# Altium PCB Power_Board.PcbDoc (part 3 of 3)
Units mil, origin at the board's own origin, x right, y up, seen from the top; angles counter-clockwise.
Board outline 5980 x 2140 mil, 4 copper layers (Top Layer, Layer 1, Layer 2, Bottom Layer), stack 23.756 mil thick; 228 components, 110 nets, 609 pads, 397 vias.
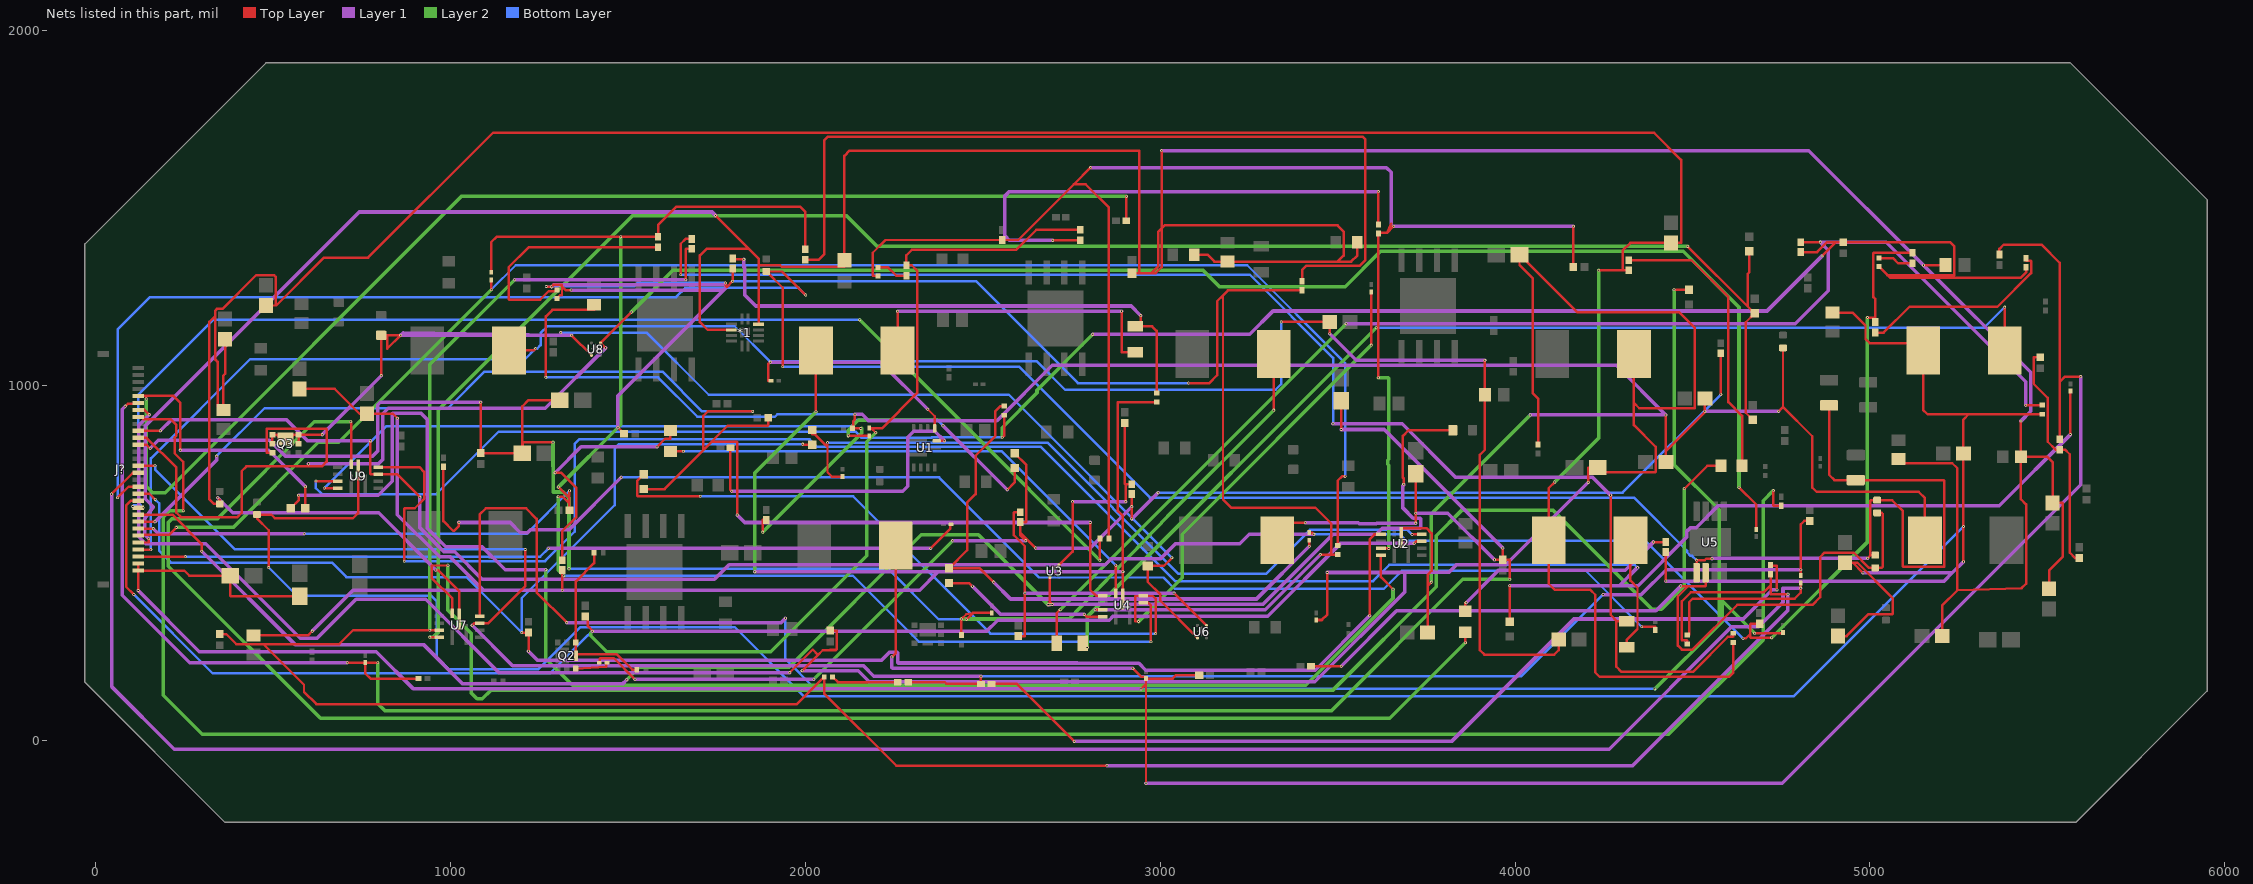
[diagram p5: the nets of this part, all layers, seen from the top]

## Via types
v1: diameter 7.87, hole 3.94, Top Layer to Layer 1, 260 vias
v2: diameter 7.87, hole 3.94, Top Layer to Bottom Layer, 100 vias
v3: diameter 7.87, hole 3.94, Layer 2 to Bottom Layer, 17 vias
v4: diameter 7.87, hole 3.94, Layer 1 to Layer 2, 14 vias
v5: diameter 19.68, hole 7.87, Top Layer to Bottom Layer, 6 vias

## Nets (pads, with @x,y where several pads share a name; then routed paths per layer and width w, separated by ;. In a path a pad name is that pad's centre, name@x,y a point inside that pad or via, vN(x,y) a via of type N, cw(c..) or ccw(c..) an arc to the next point about the centre after c; other vN are vias at no path point) (continued)
NetC33_2: C33.2 C34.1 C35.1 C36.1 C37.1 L3.1 R14.1 R17.1 U2.7 | length 6995.7
  Top Layer w7: v2(1269,1024) 1269,1195.5 1287.5,1214 1405,1214 C33.2@1405,1228.43 ; v1(1880,588) 1880,621.6 1880.5,622.1 R14.1@1890,622.1 ; v2(2140,920) 2139.83,919.83 2139.83,905.07 2134.76,900 2134.76,881.96 R17.1@2132.79,880 v1(2156.2,880) ; U2.7@3679.69,573.31 3679.69,599 3750,599 3765,584 3765,479 3753.56,467.56 3753.56,436.56 ; C35.1@3753.56,305 3753.56,436.56 ; v2(3764,447) 3753.56,436.56 ; C34.1@4425,785 4425,816 ; v1(4425,918) 4425,816 ; C36.1@4535,965 v2(4535,928) 4535,926 4425,816 ; v2(4742.5,928) 4755,940.5 ; C37.1@4755,1107.28 4755,940.5 ; L3.1@5155,565 5155,683.5 5137.5,701 4850,701 4837.5,713.5 4837.5,858 4755,940.5
  Layer 1 w10: v2(2140,920) 2160,920 2178,902 2540,902 2696,1058 4285,1058 v1(4425,918) v4(4043,918) ; v2(4535,928) v2(4742.5,928)
  Layer 2 w10: v1(1880,588) 2159,867 2159,880 ; v2(3764,447) 3764,639 v4(4043,918)
  Bottom Layer w7: v2(1269,1024) 1585,1024 1696,913 1914.38,913 1921.38,920 v2(2140,920)
NetC38_1: C38.1 R25.2 R26.1 | length 660.6
  Top Layer w7: R25.2@5480,1080.75 5461.75,1080.75 5461,1080 5461,1006 5501,966 5501,842.5 5523.26,820.24 R26.1@5535,820.24 5550,820.24 5563,807.24 5563,530 5578.35,514.65 C38.1@5590,514.65
NetC48_1: C48.1 R29.2 U3.3 | length 585.6
  Top Layer w7: U3.3@2715,495 2753,533 v2(2753,674) ; C48.1@2900,895 2900,723.9 2901,722.9 2904,722.9 ; v2(2903,674) 2903,721.9 2904,722.9 ; R29.2@2920,722.9 2904,722.9
  Layer 1 w10: v2(2753,674) v2(2903,674)
NetC52_1: C52.1 U4.8 | length 1466.7
  Top Layer w7: C52.1@1620,815.47 v1(1656.47,815.47) ; U4.8@2875.32,415.75 v1(2875.32,494)
  Bottom Layer w7: v1(1656.47,815.47) 2553.84,815.47 v1(2875.32,494)
NetC52_2: C52.2 R33.2 | length 685.1
  Top Layer w7: v1(1295,755) 1312.65,755 1355,712.65 1355,631 1315,591 R33.2@1315,508.95 ; v1(1582,828) 1605,851 1619,851 C52.2@1620,874.53
  Layer 1 w10: v1(1295,755) 1368,828 v1(1582,828)
NetC55_1: C55.1 L5.2 | length 894.4
  Top Layer w7: L5.2@2260,1100 v1(2260,1210) ; v1(2891,1210) 2891,1096 2892,1095 C55.1@2930,1095
  Layer 1 w10: v1(2260,1210) v1(2891,1210)
NetC55_2: C55.2 R36.2 R39.2 | length 1546.3
  Top Layer w7: R39.2@1795,1358.95 1795,1357 v1(1827,1357) ; C55.2@2930,1167.83 C55.2@2945,1167.83 ; v2(2945,1198) C55.2@2945,1167.83 ; R36.2@2990,980 2990,1155 2977.17,1167.83 C55.2@2945,1167.83
  Layer 1 w10: v1(1827,1357) 1827,1334.94 1829.94,1332 1829.94,1255.06 1860,1225 2918,1225 v2(2945,1198)
NetC56_2: C56.2 C57.1 C58.1 L5.1 R33.1 R36.1 U4.7 | length 5373.3
  Top Layer w7: C56.2@445,296.57 598.07,296.57 v1(610.57,309.07) ; C57.1@575,991.44 674,991.44 744,921.44 C58.1@765,921.44 837.84,921.44 v1(850.5,908.78) ; v1(1315,424) R33.1@1315,481.05 ; v1(2030,927) L5.1@2030,1100 ; U4.7@2895,400 v1(2895,476) 2895,633 2881,647 2881,953.41 2882,954.41 R36.1@2990,954.41
  Layer 1 w10: v1(610.57,309.07) 725.5,424 1093,424 ; v1(850.5,908.78) 850.5,637.23 969.54,518.19 998.81,518.19 1093,424 ; v1(1858,476) 2374,476 ; v1(2895,476) 2374,476 ; 1093,424 v1(1315,424) 2322,424 2374,476
  Layer 2 w10: v1(1858,476) 1858,755 v1(2030,927)
  other v2: 2895,476
NetC64_1: C64.1 R43.1 R44.1 U5.2 | length 2368.5
  Top Layer w7: R43.1@3424.76,210 v1(3510,210) ; v1(4467,436) 4486.5,436 ; U5.2@4537.2,473.39 4537.2,437 4536.2,436 4486.5,436 ; R44.1@5020,642.28 5033,642.28 5036.38,638.9 5036.38,490.67 5033,487.28 C64.1@5015,487.28 4997.22,487.28 4954.5,530 4872.5,530 4860,517.5 4860,405 4838,383 4626,383 4500,257 4470,257 4458.75,268.25 4458.75,407.25 4486.5,435 4486.5,436
  Layer 1 w10: v1(3510,210) 3666,366 4397,366 v1(4467,436)
NetC66_1: C66.1 C88.1 Q3.1 Q3.2 Q3.5 Q3.6 Q3.7 U6.1 U8.1 | length 4042.4
  Top Layer w7: Q3.2@498.09,837.2 Q3.1@498.09,862.8 510,862.8 522.8,850 Q3.7@535,850 547,850 559.8,862.8 Q3.6@571.91,862.8 ; Q3.5@571.91,837.2 Q3.6@571.91,862.8 ; v2(639,862.8) Q3.6@571.91,862.8 ; v2(805,1028.8) C88.1@805,1142.44 821,1142.44 ; v2(1341.26,1142.44) U8.1@1397.2,1086.5 ; v1(3033,515.5) 3009.94,492.44 C66.1@2965,492.44 2965,447.43 3000.46,411.97 3000.46,394.54 U6.1@3105,290 ; 821,1142.44 v2(859.44,1142.44) 822,1105 822,1141.44 821,1142.44
  Layer 1 w10: v2(639,862.8) v2(805,1028.8) ; v1(1311,1150) 1311,1142.44 ; v2(1341.26,1142.44) 1311,1142.44 ; 1311,1142.44 v2(859.44,1142.44) 867,1150 1310.87,1142.44 1311,1142.44
  Bottom Layer w7: v1(1311,1150) 1553,1150 1728,975 2573.5,975 v1(3033,515.5)
NetC67_1: C67.1 R45.2 U6.3 | length 1067.8
  Top Layer w7: C67.1@2600,294.65 2618,294.65 ; R45.2@2605,643.95 2589,643.95 2588,642.95 2588,579 2619,548 v2(2619,416) ; v2(3039.04,416) U6.3@3130.59,324.45 ; 2618,294.65 v2(2619,416) ; 2618,294.65 2619,295.65 v2(2619,416)
  Layer 1 w10: v2(2619,416) v2(3039.04,416)
NetC71_1: C71.1 U7.8 | length 4867.3
  Top Layer w7: v1(993,494) 947,493 947,458.94 1005.63,400.31 U7.8@1005.63,359.06 ; v1(4477,710) 4542,775 C71.1@4580.47,775
  Layer 2 w10: v1(993,494) 993,368 1058,303 1058,135 1075,118 1090,118 1113.68,141.68 3485.68,141.68 3778,434 3778,578 3849,649 4108,649 4386,371 4412.5,371 4477,435.5 v1(4477,710)
NetC71_2: C71.2 R51.2 | length 815
  Top Layer w7: R51.2@4320,1353.95 4497.05,1353.95 4601,1250 4601,954 4639.53,915.47 C71.2@4639.53,775
NetC74_1: C74.1 L6.2 | length 322.1
  Top Layer w7: C74.1@4315,263.58 4315,285 4345,315 4345,431 4325,451 L6.2@4325,565
NetC74_2: C74.2 R54.2 R57.2 | length 4015.8
  Top Layer w7: v1(1649,1313) 1649,1400.45 1662.5,1413.95 R57.2@1680,1413.95 ; v1(4269,691.94) 4269,354.92 4287.5,336.42 ; C74.2@4315,336.42 4287.5,336.42 ; R54.2@4615,302.8 4615,294 4614,293 4600,293 4501,194 4300,194 4285,209 4285,333.92 4287.5,336.42
  Layer 1 w10: v1(3487,893) 3682,893 3833.06,741.94 4219,741.94 v1(4269,691.94)
  Bottom Layer w7: v1(1649,1313) 3253,1313 3487,1079 v1(3487,893)
NetC75_2: C75.2 C76.1 C77.1 C78.1 C79.1 L6.1 R51.1 R54.1 U7.7 | length 8791
  Top Layer w7: v1(344,685) 350,679 C79.1@350,667.28 333.72,667.28 321,680 321,1180.53 337.5,1197.03 ; C77.1@365,1131.44 365,1034 360,1029 C75.2@360,931.57 357.05,931.57 343.81,944.81 343.81,1067.76 337.5,1074.08 337.5,1197.03 ; C78.1@480,1226.44 506.44,1226.44 507,1226.44 ; v1(959,481) 964.97,481 1025.32,420.65 U7.7@1025.32,343.31 ; v1(4112,729) 4095,712 L6.1@4095,565 4095,442.5 4112.5,425 4212.5,425 4226,411.5 4226,192.5 4238.5,180 4602.5,180 4615,192.5 R54.1@4615,277.2 ; v1(4236.05,1326.05) 4304,1326.05 ; R51.1@4320,1326.05 4304,1326.05 ; 337.5,1197.03 337.5,1212.16 342.11,1216.77 357.24,1216.77 452.24,1311.77 502.89,1311.77 507.24,1307.41 507.24,1226.68 507,1226.44 ; 507,1226.44 509.03,1226.44 644.04,1361.45 768.14,1361.45 1120,1713.3 4391.7,1713.3 4468,1637 4468,1403.88 4467,1402.88 C76.1@4440,1402.88 4324.88,1402.88 4303,1381 4303,1327.05 4304,1326.05
  Layer 1 w10: v1(344,685) 387,642 798,642 v1(959,481)
  Layer 2 w10: v1(4112,729) 4236.05,853.05 v1(4236.05,1326.05)
NetC92_1: C92.1 U9.8 | length 4826
  Top Layer w7: v2(719,899) 720,898 U9.8@720,779.06 ; v2(3860,276) C92.1@3860,305.94
  Layer 2 w10: v2(719,899) 616.5,899 342.5,625 214.94,625 204.94,615 204.94,492.06 634,63 3647,63 v2(3860,276)
NetC92_2: C92.2 R69.2 | length 658.7
  Top Layer w7: C92.2@3860,365 3860,387 v1(3862,389) ; v1(4390,560) R69.2@4425,560
  Layer 1 w10: v1(3862,389) 3953.37,480.37 4310.37,480.37 v1(4390,560)
NetC95_1: C95.1 L8.2 | length 3174.1
  Top Layer w7: C95.1@2781.42,275 2792.8,262.87 v2(2795,262.87) ; L8.2@5380,1100 v2(5380,1222)
  Layer 2 w10: v2(2795,262.87) 2795,350 v3(3609,1164)
  Bottom Layer w7: v3(3609,1164) 5322,1164 v2(5380,1222)
NetC95_2: C95.2 R72.2 R75.2 | length 3691
  Top Layer w7: C95.2@2708.58,275 2708.58,359.58 v2(2718,369) ; R75.2@4805,1405 v1(4860,1405) ; v1(5439,945.59) R72.2@5485,945.59
  Layer 1 w10: v1(3523.88,1174.88) 4789.88,1174.88 4883,1268 4883,1382 v1(4860,1405) 5046.06,1405 5439,1012.06 v1(5439,945.59)
  Layer 2 w10: v2(2718,369) v1(3523.88,1174.88)
NetC96_2: C96.2 C97.1 C98.1 C99.1 C100.1 L8.1 R69.1 R72.1 U9.7 | length 8790
  Top Layer w7: v2(488,488) 488,593 455,626 C100.1@455,637.28 495,637.28 505.28,627 725,627 739.69,641.69 U9.7@739.69,763.31 ; v1(4425,450) R69.1@4425,532.1 ; C96.2@4895,1206.57 4950.93,1206.57 4987.5,1170 4987.5,1132.5 5000,1120 5150,1120 L8.1@5150,1100 5150,932.5 5162.5,920 5278.56,920 ; C98.1@4910,295 4934,295 4996,357 5063,357 5064,358 5064,402 4964.56,501.44 4952,501.44 ; C99.1@4930,501.44 4952,501.44 ; v2(4980.44,473) 4952,501.44 ; v2(5263.56,504.56) v2(5263.56,603.56) C97.1@5263.56,810 5263.56,905 5278.56,920 ; R72.1@5485,920 5278.56,920
  Layer 1 w10: v1(4425,450) 5209,450 5232,473 ; v2(4980.44,473) 5232,473 ; v2(5263.56,504.56) 5232,473
  Bottom Layer w7: v2(488,488) 567,409 945.5,409 962,392.5 962,234 994,202 1248,202 1366,320 1801,320 1995,126 4786,126 v2(5263.56,603.56)
  other v1: 5263.56,504.56
NetQ2_3: Q2.3 R7.2 | length 99.6
  Top Layer w7: Q2.3@1353.39,203.09 1439,208 1439,220 R7.2@1440.83,220
NetQ2_4: Q2.4 Q2.8 R5.1 R6.1 | length 500.9
  Top Layer w7: Q2.8@1353.39,240 Q2.8@1353.39,243.3 ; R6.1@1405,530 1405,500.61 1353.39,449 Q2.4@1353.39,276.91 Q2.8@1353.39,243.3 ; R5.1@1525,200 1512.5,200 1469.2,243.3 Q2.8@1353.39,243.3
NetR3_1: R3.1 U1.9 | length 622.2
  Top Layer w7: v1(1901,1067) 1896.13,1062.13 1896.13,1015 R3.1@1903.35,1015 ; v1(2345,934) 2364.69,914.31 U1.9@2364.69,880.24
  Layer 1 w10: v1(1901,1067) 2212,1067 v1(2345,934)
NetR4_2: R4.2 U1.8 | length 905.8
  Top Layer w7: R4.2@1788.95,825 1788.95,707.05 v1(1792.88,703.12) ; U1.8@2370.59,844.8 v1(2392,844.8)
  Layer 1 w10: v1(1792.88,703.12) 2274.62,703.12 2289,717.5 2289,855 2306,872 2364.8,872 v1(2392,844.8)
NetR7_1: R7.1 R28.1 R29.1 R45.1 R66.2 | length 4055.5
  Top Layer w7: R7.1@1419.17,220 1421,220 1421,231.36 1422,232.36 1460.64,232.36 v1(1520,173) ; R66.2@2590,810 2622,778 2622,617.05 2621,616.05 R45.1@2605,616.05 2605,587 ; v1(2621,564) 2605,580 2605,587 ; v1(2649,543) 2605,587 ; v2(2920,625) v1(2920,659.81) R29.1@2920,695 ; v1(4580,976) R28.1@4580,1092.1
  Layer 1 w10: v1(1520,173) v2(2024,173) ; v1(2415,564) v1(2621,564) ; v1(2649,543) 2803.19,543 v1(2920,659.81) ; v2(2920,625) v1(2994,699)
  Layer 2 w10: v2(2024,173) v1(2415,564)
  Bottom Layer w7: v1(2994,699) 4303,699 v1(4580,976)
NetR11_1: R11.1 U2.12 | length 4218.4
  Top Layer w7: R11.1@550,655 572,677 v1(572,692) ; U2.12@3622.6,522.13 3622,522.13 3622,461 v2(3656,427)
  Layer 1 w10: v1(572,692) 797,692 836,731 836,922 837,923 917,923 935,905 935,599 987,547 1089,547 1154,482 v1(1269,482)
  Layer 2 w10: v1(1269,482) 1269,231 1344,156 3410,156 3656,402 v2(3656,427)
NetR12_1: R12.1 R18.1 R20.1 R21.1 R23.2 U2.11 | length 4490.5
  Top Layer w7: R21.1@2205,1310 2191,1310 2190,1311 2190,1375 2226.05,1411.05 R20.1@2555,1411.05 2600,1411.05 2756.45,1567.5 ; v1(2803.95,1615) 2756.45,1567.5 ; R12.1@2855.59,570 2855.59,1502.18 2790.27,1567.5 2756.45,1567.5 ; v1(3615,1022.88) R18.1@3615,1429.41 3615,1431 3639,1431 ; U2.11@3622.6,541.81 v1(3644,541.81) ; 3651,1457 3639,1431 ; v1(3658,1450) 3639,1431 ; R23.2@4164.25,1335 v1(4164.25,1450)
  Layer 1 w10: v1(2803.95,1615) 3637.5,1615 3651,1601.5 3651,1457 ; v1(3658,1450) v1(4164.25,1450)
  Layer 2 w10: v1(3615,1022.88) 3643,1022.88 3644,1021.88 3644,793.71 3641.06,790.77 3641.06,779.23 3644,776.29 v1(3644,541.81)
NetR13_2: R13.2 R16.1 U2.6 | length 2085.7
  Top Layer w7: R13.2@2020,875.67 2020,863.5 2020.5,863 2027.5,863 2062.5,828 ; v1(2062.5,840) 2062.5,828 ; R16.1@2105,744.99 2105,744 2075,744 2062.5,756.5 2062.5,828 ; v1(3709.82,581.18) U2.6@3736.77,581.18
  Bottom Layer w7: v1(2062.5,840) 2682.06,840 3052.06,470 3298,470 3422,594 3697,594 v1(3709.82,581.18)
NetR18_2: R18.2 R19.1 | length 1480.5
  Top Layer w7: v1(2697,1410) 2697.24,1410.24 R19.1@2775,1410.24 ; R18.2@3615,1455 v2(3615,1547.5)
  Layer 1 w10: v1(2697,1410) 2575,1410 2562.5,1422.5 2562.5,1535 2575,1547.5 v2(3615,1547.5)
NetR21_2: R21.2 R22.1 | length 89.7
  Top Layer w7: R21.2@2205,1333.62 2233,1333.62 2256.39,1310.24 R22.1@2285,1310.24
NetR30_1: R30.1 U4.12 | length 472.5
  Top Layer w7: R30.1@2405,444.33 2461.67,444.33 v1(2471,435) ; v1(2786,356) 2793.18,348.82 U4.12@2837.91,348.82
  Layer 1 w10: v1(2471,435) 2550,356 v1(2786,356)
NetR30_2: R30.2 R67.2 R70.1 | length 1656.6
  Top Layer w7: v1(2530.67,447) 2492,485.67 R30.2@2405,485.67 2456,536.67 2456,671 2480,695 2480,803 2534.75,857.75 2534.75,927.75 2549.8,942.8 R67.2@2560,942.8 ; v1(3420,548.01) R70.1@3420,565
  Layer 1 w10: v1(2530.67,447) 2578.3,399.37 3271.36,399.37 v1(3420,548.01)
NetR31_1: R31.1 R37.1 R39.1 R40.1 R42.2 U4.11 | length 5917.1
  Top Layer w7: v1(1270,1280) 1270.24,1280 1271.07,1279.17 1284.83,1279.17 v2(1285,1279) 1285,1279.24 1285.67,1279.91 1285.67,1279.97 1290.03,1284.33 1309.97,1284.33 1324.3,1270 v1(1340,1270) ; R40.1@1300,1246.38 1309.29,1255.67 1313,1255.67 1314.33,1257 1314.33,1283 1313,1284.33 ; v2(1472,882.25) R42.2@1489.25,865 ; v3(1775,1290) 1775.17,1289.83 1775.17,1282.83 1779,1279 v1(1795,1295) R39.1@1795,1331.05 ; v1(2816.84,369) 2817.34,368.5 U4.11@2837.91,368.5 ; v1(3080,1008) 3138.5,1008 3160.5,1030 3160.5,1238.5 3177,1255 ; R37.1@3400,1269.41 3400,1269 3191,1269 3177,1255 ; v1(3451.41,524.41) R31.1@3500,524.41 3482.68,525.73 3482.68,611.32 3437,657 3200,657 3177,680 3177,1255
  Layer 1 w10: v2(1285,1279) 1291,1285 1775,1285 1775.86,1284.14 1775.86,1275.86 1770,1270 ; v1(1340,1270) 1770,1270 ; v2(1472,882.25) 1472,972 1770,1270 ; v1(2816.84,369) 3296,369 v1(3451.41,524.41)
  Bottom Layer w7: v1(1270,1280) 1517.5,1280 1527.5,1290 v3(1775,1290) ; v1(1795,1295) 2481,1295 2768,1008 v1(3080,1008)
  other v1: 1775,1290
  other v3: 1270,1280
  other v4: 1270,1280 1775,1290
NetR32_2: R32.2 R35.1 U4.6 | length 3128.7
  Top Layer w7: R32.2@1545,750.67 1525.75,731.42 1525.75,691 1527.75,689 v1(1704,689) ; v2(2939,336) 2931,336 2930,337 2930,406.87 2931,407.87 U4.6@2952.09,407.87 2979.13,407.87 2987,400 v1(2987,302) ; v2(3595,1115) R35.1@3595,1264.99
  Layer 2 w10: v2(2939,336) 3061.88,458.88 3061.88,581.88 v2(3595,1115)
  Bottom Layer w7: v1(1704,689) 2134.5,689 2521.5,302 v1(2987,302)
NetR37_2: R37.2 R38.1 | length 2474
  Top Layer w7: R38.1@2000,1355.24 2037.5,1355.24 2054,1371.74 2054,1692.5 2063.87,1702.37 3570.13,1702.37 3578,1694.5 3578,1354.5 3562.5,1339 3412.5,1339 3400,1326.5 R37.2@3400,1295
NetR40_2: R40.2 R41.1 | length 684
  Top Layer w7: R40.2@1300,1270 1296.61,1270 1296.61,1266.56 1276.56,1266.56 1253,1243 1165,1243 1164,1244 1164,1334.24 1220,1390.24 R41.1@1585,1390.24
NetR46_1: R46.1 R47.1 R48.1 U7.12 | length 5207.9
  Top Layer w7: v1(942,292.13) U7.12@968.23,292.13 ; v1(4486.33,1393) 4655,1224.33 ; R46.1@4660,1379.33 4660,1320 4655,1315 4655,1224.33 ; R48.1@4670,904.33 4650,924.33 4650,1179.33 R47.1@4675,1204.33 4655,1224.33
  Layer 2 w10: v1(942,292.13) 952.13,292.13 965,305 965,931 1514,1480 2115,1480 2202,1393 v1(4486.33,1393)
NetR49_1: R49.1 R55.1 R57.1 R58.1 R60.2 U7.11 | length 7593.9
  Top Layer w7: R60.2@350,300.75 368.25,300.75 397,272 473,272 ; U7.11@968.23,311.81 v2(942,311.81) 726,311.81 686.19,272 473,272 ; v1(1663,1299) 1663,1385.05 1664,1386.05 R57.1@1680,1386.05 ; v2(2850,-70) 2256.19,-70 2053.19,133 R58.1@2053.19,180 1976.19,103 622.15,103 587.32,137.82 587.32,157.68 473,272 ; R49.1@4485,272.2 4485,282 4484,283 4470.69,283 4469.69,284 4469.69,392.75 4494.94,418 4700,418 4720,438 ; R55.1@4720,469.41 4720,438 ; v1(4769,413) 4721,413 4720,414 4720,438
  Layer 1 w10: v2(1181,1299) v1(1663,1299) ; v2(2850,-70) 4331,-70 4769,368 v1(4769,413)
  Layer 2 w10: v2(942,311.81) 942,1060 v2(1181,1299)
NetR50_2: R50.2 R53.1 U7.6 | length 5591.2
  Top Layer w7: U7.6@1082.4,351.18 1082,351.18 1082,637 1100,655 1213,655 1243,625 1243,418 v2(1328,333) ; v1(4448,1271) 4448.33,1270.67 R50.2@4490,1270.67 ; v1(4675,303) 4755,303 R53.1@4755,304.98
  Layer 1 w10: v2(1328,333) 1932,333 v1(1944,345)
  Layer 2 w10: v3(4394,146) 4575,327 ; v1(4448,1271) 4448,778 4575,651 4575,327 ; v1(4675,303) 4584,394 4584,336 4575,327
  Bottom Layer w7: v1(1944,345) 1944,230 2028,146 v3(4394,146)
NetR55_2: R55.2 R56.1 | length 2544.5
  Top Layer w7: R56.1@2524.53,160 2596,160 v1(2758,-2) ; R55.2@4720,495 4720,493 4737,493 v2(4738,425)
  Layer 1 w10: v1(2758,-2) 3821,-2 4166,343 4643,343 4725,425 v2(4738,425)
NetR58_2: R58.2 R59.1 | length 189.6
  Top Layer w7: R58.2@2076.81,180 2091.81,165 R59.1@2260.24,165
NetR64_1: R64.1 R86.1 | length 3897.5
  Top Layer w7: R64.1@980,772.2 980,619 1008,591 1010,591 1024,605 v2(1024,615) ; v1(4357,321) 4395,321 R86.1@4395,312.2
  Layer 1 w10: v2(1024,615) 1168.06,615 1197,586.06 1217.06,586.06 1225,594 1333,594 v1(1481,742)
  Bottom Layer w7: v1(1481,742) 2377,742 2659,460 3009,460 3041,428 3630,428 3680.87,478.87 4199.13,478.87 v1(4357,321)
NetR66_1: R66.1 U9.12 | length 2194.1
  Top Layer w7: v1(644.87,712.13) U9.12@682.6,712.13 ; v1(2569,707) 2590,728 R66.1@2590,768.66
  Layer 1 w10: v2(2388,888) v1(2569,707)
  Bottom Layer w7: v1(644.87,712.13) 818.75,886 2128,886 2147,905 2371,905 v2(2388,888)
NetR67_1: R67.1 R73.1 R75.1 R76.1 R78.2 U9.11 | length 5932.4
  Top Layer w7: v2(621,731.81) U9.11@682.6,731.81 ; v2(2555,855) 2560,860 R67.1@2560,917.2 ; R75.1@4805,1377.1 4851,1377.1 4878.9,1405 4904,1405 ; v2(4865,1366) 4904,1405 ; R76.1@5025,1336.38 5049.38,1312 ; R73.1@5440,1334.41 5440,1319.97 5424.03,1304 5057.38,1304 5049.38,1312 ; 4904,1405 R78.2@4925,1405 5225.5,1405 5238,1392.5 5238,1313 5237,1312 5049.38,1312
  Layer 1 w10: v1(2810,1145) 3252,1145 3318,1211 4710,1211 v2(4865,1366)
  Layer 2 w10: v2(2555,855) 2555,882.42 2652.87,980.29 2652.87,987.87 v1(2810,1145)
  Bottom Layer w7: v2(621,731.81) 621,711.5 637.5,695 960,695 1136,871 2141,871 2158,854 2355.88,854 2356.88,855 v2(2555,855)
  other v1: 2555,855
NetR68_2: R68.2 R71.1 U9.6 | length 6438.2
  Top Layer w7: U9.6@796.77,771.18 912.5,771.18 926,757.68 926,681.5 899.5,655 871,655 870,654 v2(870,506) ; R68.2@3985,335 v1(3985,437) ; v1(5565,863) R71.1@5565,984.99
  Layer 1 w10: v1(3985,437) 4294,437 ; v2(4345,488) 4294,437 ; v1(5565,863) 5364,662 4572,662 4510.43,600.43 4494.19,600.43 4483.19,589.43 4483.19,573.19 4347,437 4294,437
  Bottom Layer w7: v2(870,506) 1267,506 1350,589 1350,836.5 1362.5,849 2012,849 2033,828 2664,828 3042,450 3600,450 3646,496 4337,496 v2(4345,488)
NetR73_2: R73.2 R74.1 | length 564.6
  Top Layer w7: R74.1@5015,1150.24 5038.74,1150.24 5111.5,1223 5359.33,1223 5454.33,1318 5454.33,1351 5453.33,1352 5440,1352 R73.2@5440,1360
NetR76_2: R76.2 R77.1 | length 101.1
  Top Layer w7: R76.2@5025,1360 5065,1360 5079.76,1345.24 R77.1@5120,1345.24
PWR_EN: J?.26 R8.2 R11.2 | length 4154.9
  Top Layer w7: J?.26@120.28,971.69 142,971.69 ; v1(143,963) 143,970.69 142,971.69 ; v1(238.42,819) 238.42,952.58 219.31,971.69 142,971.69 ; R11.2@591.34,655 v1(591.34,715.66) ; R8.2@2904.76,1465 v1(2904.76,1534)
  Layer 1 w10: v1(238.42,819) 488,819 v1(591.34,715.66)
  Layer 2 w10: v1(143,963) 143,717.5 161.5,699 196,699 1031,1534 v1(2904.76,1534)
VCC5V: C9.2 C10.1 C11.1 J?.4 L1.2 | length 5708
  Top Layer w7: J?.4@120.28,538.62 v2(156,538.62) ; L1.2@1165,1100 1235,1100 v2(1240,1105) ; v1(3341,1180) C10.1@3477.88,1180 v1(3477.88,1147) ; v1(3915,1072.09) C9.2@3915,975 3915,820 3901,806 3901,255 3913.5,242.5 4110.38,242.5 4122.88,255 C11.1@4122.88,285
  Layer 1 w10: v1(3477.88,1147) 3552.79,1072.09 v1(3915,1072.09)
  Bottom Layer w7: v2(156,538.62) 156,795.46 435.54,1075 1210,1075 v2(1240,1105) 1240.17,1105.17 1244.52,1105.17 1254.08,1114.73 1254.08,1149.08 1273,1168 1801,1168 1899,1070 2651,1070 2732,989 3325,989 3341,1005 v1(3341,1180)
  other v1: 1240,1105
VCC5V_EN: J?.3 R1.2 | length 2335.1
  Top Layer w7: J?.3@120.28,518.94 v1(253,518.94) ; v1(2353,542) 2408,597 2408,610 R1.2@2410.01,610
  Layer 1 w10: v2(1276,542) v1(2353,542)
  Bottom Layer w7: v1(253,518.94) 1252.94,518.94 v2(1276,542)
VCC_MCU: *1.2 *1.10 C14.2 C15.1 C16.2 C17.1 C19.2 C20.1 C21.1 C22.2 C23.2 C24.2 C25.1 J?.5 | length 11203.1
  Top Layer w7: J?.5@120.28,558.31 150,559.31 v1(150,569) ; v1(1746.88,1480.12) 1840,1387 ; *1.2@1791.81,1157.87 1725,1157.87 1703,1179.87 1703,1367.5 1722.5,1387 1840,1387 ; *1.10@1868.19,1173.62 1868.19,1339 ; C17.1@2920,1317.68 2939.68,1317.68 ; v1(3004,1663) 3004,1443.5 ; C16.2@3096.02,1370 3133,1370 3153,1350 C15.1@3190,1350 3500,1350 ; C14.2@3555.51,1405 3555.51,1367.5 3538.01,1350 3500,1350 ; C20.1@5080,793.43 5082,793.43 5082,782 5232,782 5246,768 5246,423.44 ; v1(5151,1340) C21.1@5213.43,1340 ; C22.2@5203.56,295 5203.56,381 5246,423.44 ; v1(5425.59,901) C25.1@5425.59,800 ; C23.2@5505,428.56 5505,480 5543,518 5543,669 5542,670 C24.2@5515,670 5515,785 5500,800 C25.1@5425.59,800 ; 1840,1387 1868.19,1358.81 1868.19,1339 ; 1868.19,1339 1869.19,1340 1929,1340 1933,1336 2110,1336 C19.2@2110,1354.06 2110,1648 2125,1663 2940,1663 2941,1662 2941,1319 2939.68,1317.68 ; 2939.68,1317.68 2975,1317.68 ; 2975,1317.68 2987.5,1317.68 3004,1334.18 3004,1443.5 ; 2975,1317.68 2995,1337.68 2995,1434.5 3004,1443.5 ; 3004,1443.5 3012.5,1452 3500,1452 3517,1435 3517,1367 3500,1350 ; 5246,423.44 5427.5,430 5440,442.5 5440,666 5425.59,680.41 C25.1@5425.59,800
  Layer 1 w10: v1(150,569) 139,580 139,627 163,659 140,682 140,887 743,1490 1737,1490 v1(1746.88,1480.12) ; v1(3004,1663) 4828,1663 v1(5151,1340) 5453,1038 5453,928.41 v1(5425.59,901)
VDD_CPU_A: J?.15 R49.2 R52.1 | length 6136.8
  Top Layer w7: v2(45,695) 105.16,755.16 J?.15@120.28,755.16 ; R49.2@4485,297.8 4485,298.36 4490.88,298.36 4490.88,390.88 4500,400 4787.5,400 4805,417.5 v1(4805,430) R52.1@4805,444.17
  Layer 1 w10: v2(45,695) 45,153 222,-24 4265,-24 4610,321 4686,321 4755,390 4755,429 v1(4805,430)
VDD_DDR: C101.1 C104.1 C105.1 C106.2 J?.24 L9.2 R80.2 | length 8091.5
  Top Layer w7: J?.24@120.28,932.32 137.68,932.32 v1(151,919) ; v1(1956,192) 2021,257 2036,242 ; v1(1991,197) 2036,242 ; C106.2@2070,310.35 2088,310.35 2089,258 ; C101.1@3440,339.98 3455,339.95 3471,355.95 ; C101.1@3440,339.98 3440,341 3456,341 3471,356 v1(3471,474) v2(3471,474.19) ; R80.2@4065,835 4065,964 4050,979 4050,1303 4012.5,1340.5 C105.1@4012.5,1370 4015.43,1370 4033.71,1351.72 4033.71,1348.79 4175.5,1207 4462.84,1207 4506.79,1163.06 4506.79,938 4505.79,937 4350,937 4335,952 ; v1(4206,728) 4206,769 C104.1@4232.5,770 4232.5,757 4395.44,757 4396.44,758 4396.44,828 4335,889.44 4335,952 ; L9.2@4335,1090 4335,952 ; 2036,242 2049,255 ; 2049,255 2086,255 2089,258 ; 2049,255 2089,258
  Layer 1 w10: v1(151,919) 121.19,889.19 121.19,574.87 141,555.06 310.94,555.06 577,289 624,289 734,399 930,399 1137,192 v1(1956,192) ; v1(1991,197) 2149,197 2180,166 3436,166 3689,419 3689,474.19 ; v1(3471,474) 3675,474 3689,474.19 ; v2(3471,474.19) 3689,474.19 ; v1(4206,728) 3974,496 3835,496 3813.19,474.19 3689,474.19
VDD_EE: J?.10 R12.2 R15.1 | length 3877.7
  Top Layer w7: v2(2121.14,859) 2180,859 R15.1@2180,859.17 ; v2(2830,509) R12.2@2830,570
  Layer 2 w10: v2(2121.14,859) 2121.14,875.14 2149,903 2436,903 ; v3(2153,1186) 2436,903 ; v2(2830,509) 2436,903
  Bottom Layer w7: v3(105,660) 105,660.24 108.63,663.87 108.63,663.97 126.83,663.97 120,670.8 120,974.61 331.39,1186 v3(2153,1186)
  other v1: 2830,509 134.06,656.73 105,660
  other v4: 105,660
VDD_GPU: J?.6 R31.2 R34.1 | length 4384.9
  Top Layer w7: J?.6@120.28,577.99 139.22,580.98 207.85,580.98 v1(227.87,601) ; v1(1115,1271) R34.1@1115,1298.35 ; R31.2@3500,550 3500,732.5 3512.5,745 v1(3521,745)
  Layer 2 w10: v1(227.87,601) 387.5,601 627.5,841 685,841 v1(1115,1271)
  Bottom Layer w7: v1(1115,1271) 1184,1340 3245.28,1340 3521,1064.28 v1(3521,745)
VDD_NPU: C39.1 C42.1 C43.1 C44.2 J?.1 J?.2 L4.2 R26.2 R27.2 | length 9145.6
  Top Layer w7: v1(120,423.29) 120,479.57 J?.1@120.28,479.57 ; J?.2@120.28,499.25 J?.1@120.28,479.57 ; C42.1@575,407.5 381,407.5 380,408.5 C43.1@380,465 264.57,465 250,479.57 J?.1@120.28,479.57 ; v1(2244,236) 2255,247 L4.2@2255,550 ; v1(2923.04,203.96) 2947,180 2960,180 C39.1@2960,174.99 ; v1(2946,146) 2960,160 ; v2(2960,-120) 2960,160 ; C44.2@3110,185 3045.01,185 3035,174.99 C39.1@2960,174.99 ; R27.2@5365,1370 5365,1386.23 5376.94,1398.17 5483.17,1398.17 5535,1346.34 5535,1011 ; R26.2@5535,849.76 5535,1011 ; v2(5594,1026) 5550,1026 5535,1011 ; 2960,160 C39.1@2960,174.99
  Layer 1 w10: v1(120,423.29) 292.29,251 791,251 896,146 v1(2946,146) ; v1(2244,236) 2244,206.39 2246.43,203.96 v1(2923.04,203.96) ; v2(2960,-120) 4753,-120 5594,721 v2(5594,1026)
VDDAO_1V8: C59.1 C60.1 C61.1 C64.2 J?.13 R44.2 U5.1 | length 7616.6
  Top Layer w7: v1(62,685) 92.79,715.79 J?.13@120.28,715.79 ; C61.1@1890,1322.28 C61.1@1890.72,1322.28 ; v1(1936.5,1054) 1936.5,1276.5 C61.1@1890.72,1322.28 ; v1(2001,1256) 1934.72,1322.28 C61.1@1890.72,1322.28 ; U5.1@4511.61,473.39 v1(4511.61,509) 4534.63,509 4538.22,512.59 4554.83,512.59 v2(4555,512.76) ; C59.1@4885,945 4885,749.57 4900,734.57 C60.1@4960,734.57 5207.43,734.57 5210,732 5210,491 5209,490 5094,490 5093,491 5093,647.22 5062.5,677.72 R44.2@5020,677.72 5002,677.72 5001,676.72 5001,523.72 5002,522.72 ; v1(4993.28,514) 5002,522.72 ; C64.2@5015,522.72 5002,522.72
  Layer 1 w10: v2(4555,512.76) 4556.24,514 v1(4993.28,514)
  Bottom Layer w7: v1(62,685) 62,1159 153,1250 1636,1250 1662,1276 1981,1276 v1(2001,1256) ; v1(1936.5,1054) 2602,1054 2971,685 4335,685 4484.69,535.31 4484.69,531.19 4494.81,521.07 4498.93,521.07 4511.38,508.62
VDDCPU_A_PWM: C73.1 J?.16 R52.2 R56.2 R59.2 U7.5 | length 5823.8
  Top Layer w7: J?.16@120.28,774.84 v2(167.37,774.84) ; v2(1061,325) 1067.5,331.5 U7.5@1082.4,331.5 1107,331.5 1211,435.5 v2(1211,539) ; R59.2@2289.76,165 2393,165 2398,160 R56.2@2495,160 v1(2495,182) ; R52.2@4805,465.83 v2(4805,482) 4805,609.65 4815,619.65 C73.1@4830,619.65
  Layer 1 w10: v2(1061,325) 1175.06,210.94 2164.06,210.94 2193,182 v1(2495,182) ; v1(4248,412) 4356.02,412 4426.02,482 v2(4805,482)
  Bottom Layer w7: v2(167.37,774.84) 167.54,774.67 167.54,763.8 392.34,539 v2(1211,539) ; v1(2495,182) 4018,182 v1(4248,412)
VDDCPU_B_PWM: C94.1 J?.21 R70.2 R74.2 R77.2 U9.5 | length 6551.5
  Top Layer w7: J?.21@120.28,873.27 v1(182.68,873.27) ; v1(774,845) 774,752.5 775,751.5 U9.5@796.77,751.5 849,751.5 v1(914,686.5) ; R70.2@3420,586.65 R70.2@3420,586 ; v1(4642.38,288.31) 4650,288.31 4663,301.31 ; v1(4723,290) 4664,290 4663,291 4663,301.31 ; v1(4993,1192.5) 5014,1192.5 5015,1191.5 ; R74.2@5015,1179.76 5015,1191.5 ; R77.2@5120,1374.76 5011,1374.76 5010,1373.76 5010,1250 5015,1245 5015,1191.5 ; R70.2@3420,586 3429,586 v2(3433,582) R70.2@3420,586 ; 4663,301.31 4663,328.65 ; 4663,328.65 C94.1@4690,329.65 4664,329.65 4663,328.65
  Layer 1 w10: v1(182.68,873.27) 214.41,905 537,905 597,845 v1(774,845) ; v1(914,686.5) 914,599.85 981.73,532.12 1012,532.12 1089.12,455 1744,455 1785.13,496.13 2844.8,496.13 2861.67,513 3001,513 3043,555 3224,555 3251,582 v2(3433,582)
  Layer 2 w10: v1(4723,290) 4993,560 v1(4993,1192.5)
  Bottom Layer w7: v2(3433,582) 3675.13,582 3694,563.13 4367.56,563.13 v1(4642.38,288.31)
  other v1: 3433,582
VDDDDR_PWM: J?.23 R82.1 | length 6100.9
  Top Layer w7: J?.23@120.28,912.64 134,912.64 134,906.3 211.19,906.3 227.49,890 227.49,859.49 223,855 223,809.5 247,785.5 v1(247,648) ; v1(4728,705) 4728,663 4729,662 4750,662 R82.1@4750,662.2
  Layer 2 w10: v1(247,648) 209,648 191,630 191,128 301,18 4433,18 4699,284 4699,676 v1(4728,705)
VDDEE_MODE: C30.1 J?.12 R13.1 U2.9 | length 5327.2
  Top Layer w7: J?.12@120.28,696.1 151.9,696.1 v1(168,680) ; v1(1201,304.65) C30.1@1220,304.65 v1(1220,252) ; v1(1993,836) 1994.67,834.33 R13.1@2020,834.33 ; v1(3590,352) 3590,567.5 3603.68,581.18 U2.9@3622.6,581.18
  Layer 1 w10: v1(1220,252) 1245.75,226.25 2214.25,226.25 2237.94,249.94 2257,249.94 2261,245.94 2261,220 2262,219 2766.61,219 2767.71,217.9 2940.1,217.9 2959,199 3437,199 v1(3590,352)
  Bottom Layer w7: v1(168,680) 178.75,669.25 178.75,535.75 212.5,502 666,502 707,461 1044.65,461 v1(1201,304.65) 1201,402 1462.5,663.5 1462.5,823.5 1475,836 v1(1993,836)
VDDEE_PWM: C31.1 J?.11 R15.2 R19.2 R22.2 U2.5 | length 6627.4
  Top Layer w7: v1(108,412) 86,434 86,662.42 100,676.42 J?.11@120.28,676.42 ; C31.1@1380,349.65 1387.13,342.52 1387.13,322.87 1400,310 v2(1400,308.63) ; R15.2@2180,880.83 2180,880 2186.5,880 ; v2(2198.5,868) 2186.5,880 ; R19.2@2775,1439.76 2650.76,1439.76 2594,1383 2300,1383 2285,1368 R22.2@2285,1339.76 2300,1339.76 2315,1324.76 2315,979.34 2215.66,880 2186.5,880 ; v1(3715.5,556) 3721,561.5 U2.5@3736.77,561.5
  Layer 1 w10: v2(1400,308.63) 2510.63,308.63 2542,340 2856,340 2867,351 3303,351 3508,556 v1(3715.5,556)
  Layer 2 w10: v2(1400,308.63) 1395.33,303.96 1395.33,295.67 1440,251 1903,251 2173,521 2173,842.5 v2(2198.5,868)
  Bottom Layer w7: v1(108,412) 329.87,190.13 1280.13,190.13 1386.63,296.63 1387.77,296.63 1399.76,308.63 v2(1400,308.63)
  other v1: 1400,308.63
VDDGPU_MODE: C53.1 J?.8 R32.1 U4.9 | length 4502.6
  Top Layer w7: J?.8@120.28,617.36 v2(167.37,617.36) ; R32.1@1545,709.33 1602.83,709.33 ; v1(1808,636) 1808,841 1807,842 1736,842 1603.33,709.33 ; v1(1852,928) 1725,928 1712.5,915.5 1712.5,819 ; C53.1@1895.35,910 1895.35,889 1894.35,888 1781.5,888 1712.5,819 ; v1(2803,615) 2803,425 2820.13,407.87 U4.9@2837.91,407.87 ; 1602.83,709.33 1603.33,709.33 ; 1602.83,709.33 1712.5,819 ; 1603.33,709.33 1712.5,819
  Layer 1 w10: v2(167.37,617.36) 341,790.99 v1(341,802) ; v1(1808,636) 1829,615 v1(2803,615)
  Bottom Layer w7: v1(341,802) 476,937 993,937 1096,1040 1597,1040 1709,928 v1(1852,928)
VDDGPU_PWM: C54.1 J?.7 R34.2 R38.2 R41.2 U4.5 | length 5416.2
  Top Layer w7: J?.7@120.28,597.68 v1(162.68,597.68) ; R34.2@1115,1320 1115,1405 1129.76,1419.76 v2(1480,1419.76) R41.2@1585,1419.76 1585,1453 1636.89,1504.89 1984.61,1504.89 2000,1489.5 R38.2@2000,1384.76 ; v1(1303.44,687) 1317,687 1335.35,668.65 ; v2(1304.5,714.88) 1335.35,684.02 ; C54.1@1335.35,650 1335.35,668.65 ; v1(1335.35,704.5) 1335.35,684.02 ; U4.5@2952.09,388.19 2967,388.19 2974,381.19 v1(2974,279) ; 1335.35,668.65 1335.35,684.02
  Layer 1 w10: v1(162.68,597.68) 177.36,583 v1(588,583)
  Layer 2 w10: v1(1303.44,687) 1303.44,480.56 v3(1319,465) ; v2(1304.5,714.88) 1480,890.38 v2(1480,1419.76)
  Bottom Layer w7: v1(588,583) 1213.85,583 v1(1335.35,704.5) ; v3(1319,465) 2134,465 2320,279 v1(2974,279)
VDDIO_1V8: C47.1 J?.9 U3.1 | length 4688.3
  Top Layer w7: J?.9@120.28,637.05 216.9,637.05 299,554.95 v2(299,534.05) ; v2(2689.41,383.82) 2689.41,390.53 ; U3.1@2689.41,460.55 2689.41,390.53 ; v1(2695.94,384) 2689.41,390.53 ; v2(3685.96,723.04) 3685.79,723.21 3685.79,739.19 3684,740.98 3684,859 3700,875 C47.1@3824.88,875
  Layer 1 w10: v2(299,534.05) 562.05,271 924,271 1035,160 1485,160 v1(1497,172) ; v1(2684,383.82) v2(2689.41,383.82) ; v1(2695.94,384) 3289,384 3487,582 3609,582 3626,599 3732.94,599 3733.94,600 3733.94,626 3732.64,627.3 3712.5,627.3 3684,655.8 3684,717.94 3685.96,719.89 v2(3685.96,723.04)
  Layer 2 w10: v1(1497,172) 1532,207 1954,207 2327,580 2487.82,580 v1(2684,383.82)
VDDIOC_SW: J?.20 Q3.3 R65.2 U8.3 | length 6315.8
  Top Layer w7: J?.20@120.28,853.58 144,853.58 228,769.58 228,642.5 240.5,630 399.5,630 412,642.5 412,760 425,773 600,773 ; Q3.3@498.09,811.61 483,811.61 482,812.61 482,878 483,879 650,879 651,878 651,786.5 637.5,773 600,773 ; v1(600,780) 600,773 ; v1(1436.87,1106.87) U8.3@1422.8,1120.94 v2(1510,1208.15) ; v2(4631,714) 4680,665 R65.2@4680,595.01
  Layer 1 w10: v1(600,780) 796.44,780 808.94,792.5 808.94,921.13 825,937.19 1267.19,937.19 v1(1436.87,1106.87)
  Layer 2 w10: v2(1510,1208.15) 1628.23,1326.37 3119.63,1326.37 3167,1279 3521,1279 3621,1379 4474,1379 4631,1222 v2(4631,714)
VDDQ_1V1: C80.1 C83.1 C84.1 C85.2 J?.19 L7.2 R62.2 | length 4776.4
  Top Layer w7: J?.19@120.28,833.9 144.23,833.9 v1(154.06,824.06) ; v1(1085,954) C85.2@1085,810.35 1143,810.35 1143.35,810 C84.1@1202.5,810 ; v2(1289,841) 1203.5,841 C84.1@1202.5,810 ; C83.1@1307.5,960 1220,960 1202.5,942.5 C84.1@1202.5,810 ; R62.2@2440,297.8 v2(2440,343) 2453.51,356.51 2472,360 ; v2(2454,342) 2472,360 ; C80.1@2525,359.98 2472,360 ; v2(3320,931.62) L7.2@3320,1090
  Layer 1 w10: v1(154.06,824.06) 177,847 490,847 535,802 780.5,802 795,816.5 795,947.03 801.97,954 v1(1085,954)
  Layer 2 w10: v2(1289,841) 1290,700.94 1318,700.94 1334,684.94 v3(1334,485) ; v2(2440,343) 2744.13,343 3020.06,631.69 v2(3320,931.62)
  Bottom Layer w7: v3(1334,485) 2233,485 2376,342 v2(2454,342)
VDDQLP_0V6_1V1: C108.1 C111.1 C112.1 C113.2 J?.25 L10.2 R84.2 | length 6689.3
  Top Layer w7: v1(84.05,942.96) 84.28,942.96 90.92,949.6 117.87,949.6 J?.25@120.28,952.01 ; v2(709,220) C108.1@760,220 ; v1(795,220) C108.1@760,220 ; R84.2@910,175 775,175 760,190 C108.1@760,220 ; L10.2@3330,565 3330,614 v2(3409,614) ; v1(3510,877) C111.1@3510,957.5 ; v1(3720,613.36) v1(3720,641.24) C112.1@3720,752.5 ; v1(3942,510) C113.2@3965,510 ; v1(3965,543) C113.2@3965,510 ; v1(3985,455) 3985,509 3984,510 C113.2@3965,510
  Layer 1 w10: v1(84.05,942.96) 75,933.91 75,410 265,220 v2(709,220) ; v2(3409,614) 3558.25,614 3561.12,611.12 3609.12,611.12 3611.36,613.36 v1(3720,613.36) ; v1(3510,877) 3631,877 v1(3965,543) ; v1(3720,641.24) 3810.76,641.24 v1(3942,510)
  Layer 2 w10: v1(795,220) 795,104.5 814.5,85 3483,85 3853,455 v1(3985,455)
pads on no net: *1.4 *1.12 *1.13 *2.2 *2.5 *3.5 *4.5 *5.5 U1.4 U2.3 U2.4 U4.3 U4.4 U5.3 U5.7 U7.3 U7.4 U9.3 U9.4

## Polygon pours and split planes (outlines as drawn)
GND on Bottom Layer "GND_L04_P003" (solid, pour order 3): 10,1385 10,240 410,-160 5570,-160 5900,170 5900,1510 5895,1510 5545,1860 495,1860
GND on Layer 2 "GND_L03_P004" (solid, pour order 4): 495,1855 495,1830 5,1340 5,165 10,165 360,-185 5550,-185 5895,160 5890,165 5890,1515 5855,1515 5515,1855
GND on Layer 1 "GND_L02_P005" (solid, pour order 5): 5,150 5,1375 505,1875 5555,1875 5555,1870 5910,1515 5875,1480 5875,135 5550,-190 375,-190
GND on Top Layer "GND_L01_P006" (solid, pour order 6): -15,200 -15,1375 490,1880 5555,1880 5555,1865 5925,1495 5920,1490 5920,185 5540,-195 375,-195

## Text inside footprints (layer, text, board x,y; h text height)
U2: Top Overlay "REFDES" at 3704.69,464.15 h19.68 r90; Top Overlay "RefDes" at 3704.69,476.65 h19.68 r90; Top Overlay "*" at 3685,478.72 h19.68 r90; Mechanical 13 "RefDes2" at 3704.69,464.15 h19.68 r90; Mechanical 13 "*" at 3685,556.28 h19.68 r90
U4: Top Overlay "REFDES" at 2920,290.85 h19.68 r90; Top Overlay "RefDes" at 2920,303.35 h19.68 r90; Top Overlay "*" at 2900.32,305.41 h19.68 r90; Mechanical 13 "RefDes2" at 2920,290.85 h19.68 r90; Mechanical 13 "*" at 2900.32,382.97 h19.68 r90
U7: Top Overlay "REFDES" at 1050.32,234.15 h19.68 r90; Top Overlay "RefDes" at 1050.32,246.65 h19.68 r90; Top Overlay "*" at 1030.63,248.72 h19.68 r90; Mechanical 13 "RefDes2" at 1050.32,234.15 h19.68 r90; Mechanical 13 "*" at 1030.63,326.28 h19.68 r90
U9: Top Overlay "REFDES" at 764.68,654.15 h19.68 r90; Top Overlay "RefDes" at 764.68,666.65 h19.68 r90; Top Overlay "*" at 745,668.72 h19.68 r90; Mechanical 13 "RefDes2" at 764.68,654.15 h19.68 r90; Mechanical 13 "*" at 745,746.28 h19.68 r90